# Altium PCB heart.PcbDoc (part 6 of 8)
Units mil, origin at the board's own origin, x right, y up, seen from the top; angles counter-clockwise.
Board outline 5000 x 6000 mil, 2 copper layers (Top Layer, Bottom Layer); 76 components, 43 nets, 328 pads, 50 vias.
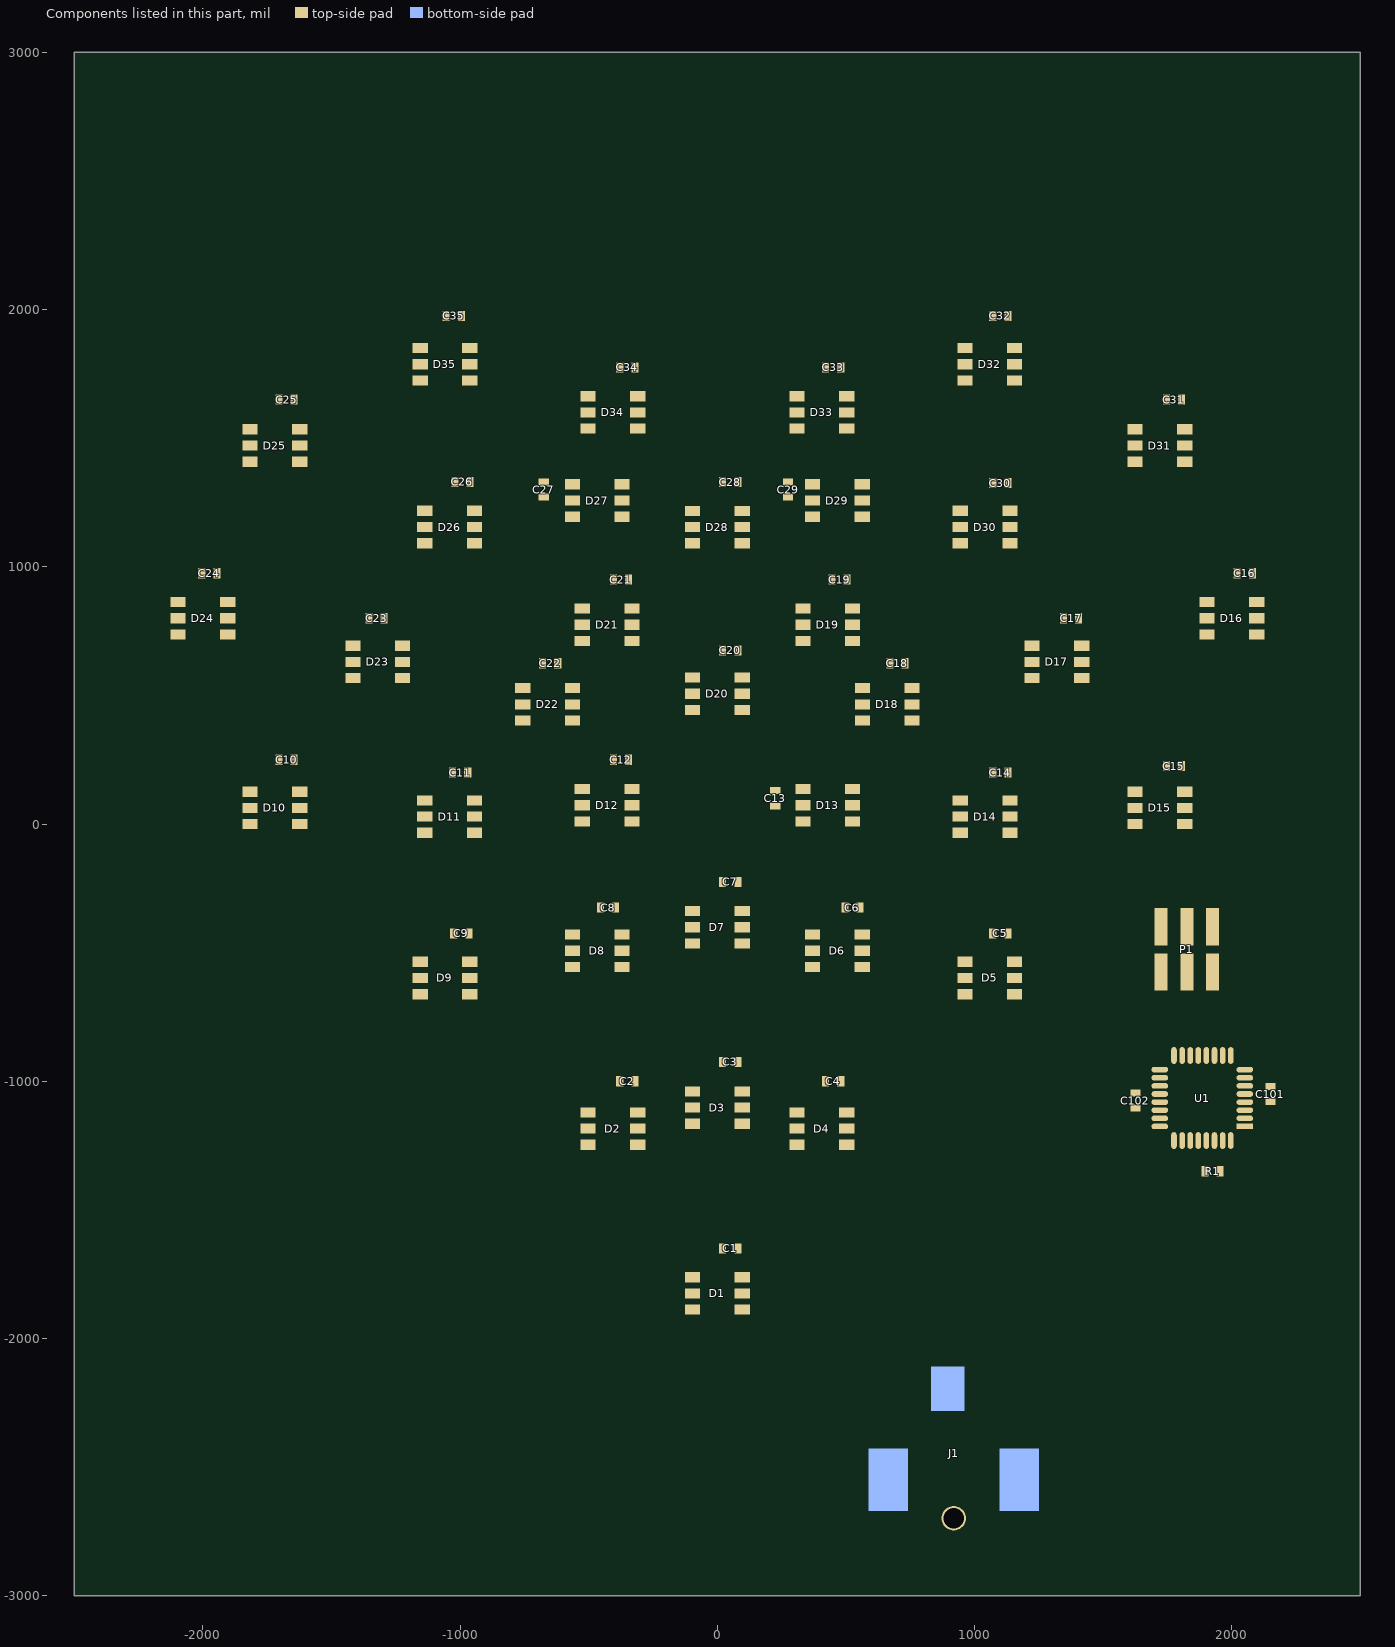
[diagram p6: the components of this part, seen from the top]

## Via types
v1: diameter 48, hole 20, Top Layer to Bottom Layer, 46 vias
v2: diameter 165, hole 150, Top Layer to Bottom Layer, 4 vias

## Nets (pads, with @x,y where several pads share a name; then routed paths per layer and width w, separated by ;. In a path a pad name is that pad's centre, name@x,y a point inside that pad or via, vN(x,y) a via of type N, cw(c..) or ccw(c..) an arc to the next point about the centre after c; other vN are vias at no path point) (continued)
copper on no net: (continued)
  Bottom Layer w2.65: -1205.16,-1289.4 -1194.54,-1289.4 ; -1205.16,-1286.75 -1194.54,-1286.75 ; -1205.16,-1284.09 -1197.19,-1284.09 ; -1205.16,-1281.44 -1197.19,-1281.44 ; -1205.16,-1278.78 -1199.85,-1278.78 ; -1202.5,-1992.98 -1128.16,-1992.98 ; -1202.5,-1841.65 -1157.37,-1841.65 ; -1202.5,-1459.32 -1077.71,-1459.32 ; -1202.5,-1307.99 -1165.33,-1307.99 ; -1202.5,-1305.33 -1112.23,-1305.33 ; -1202.5,-1302.68 -1117.54,-1302.68 ; -1202.5,-1300.02 -1122.85,-1300.02 ; -1202.5,-1276.13 -1199.85,-1276.13 ; -1199.85,-2247.87 -1157.37,-2247.87 ; -1199.85,-1923.95 -1090.99,-1923.95 ; -1199.85,-1844.3 -1154.71,-1844.3 ; -1199.85,-1270.82 -1197.19,-1270.82 ; -1197.19,-2141.66 -1125.51,-2141.66 ; -1197.19,-1990.33 -1136.13,-1990.33 ; -1197.19,-1846.96 -1152.06,-1846.96 ; -1194.54,-2250.52 -1165.33,-2250.52 ; -1194.54,-1849.61 -1149.4,-1849.61 ; -1191.88,-1921.3 -1088.34,-1921.3 ; -1191.88,-1873.51 -1186.57,-1873.51 ; -1191.88,-1870.85 -1189.23,-1870.85 ; -1191.88,-1852.27 -1146.75,-1852.27 ; -1189.23,-1987.67 -1144.09,-1987.67 ; -1189.23,-1878.82 -1181.26,-1878.82 ; -1189.23,-1876.16 -1183.92,-1876.16 ; -1189.23,-1854.92 -1146.75,-1854.92 ; -1189.23,-1549.59 -1016.65,-1549.59 ; -1189.23,-1546.94 -1024.61,-1546.94 ; -1189.23,-1544.28 -1032.58,-1544.28 ; -1189.23,-1541.63 -1043.2,-1541.63 ; -1189.23,-1538.97 -1051.16,-1538.97 ; -1189.23,-1536.32 -1061.78,-1536.32 ; -1189.23,-1281.44 -1162.68,-1281.44 ; -1189.23,-1278.78 -1157.37,-1278.78 ; -1189.23,-1276.13 -1149.4,-1276.13 ; -1189.23,-1273.47 -1144.09,-1273.47 ; -1186.57,-2157.6 -1173.3,-2157.6 ; -1186.57,-2154.94 -1173.3,-2154.94 ; -1186.57,-2139.01 -1154.71,-2139.01 ; -1186.57,-1918.64 -1083.03,-1918.64 ; -1186.57,-1886.78 -1173.3,-1886.78 ; -1186.57,-1884.13 -1175.95,-1884.13 ; -1186.57,-1881.47 -1178.61,-1881.47 ; -1186.57,-1857.58 -1144.09,-1857.58 ; -1186.57,-1552.25 -1006.03,-1552.25 ; -1186.57,-1533.66 -1072.4,-1533.66 ; -1186.57,-1395.6 -1170.64,-1395.6 ; -1186.57,-1392.95 -1173.3,-1392.95 ; -1186.57,-1390.29 -1173.3,-1390.29 ; -1186.57,-1387.64 -1175.95,-1387.64 ; -1186.57,-1384.98 -1175.95,-1384.98 ; -1186.57,-1382.33 -1175.95,-1382.33 ; -1186.57,-1379.67 -1175.95,-1379.67 ; -1186.57,-1377.02 -1173.3,-1377.02 ; -1186.57,-1270.82 -1136.13,-1270.82 ; -1183.92,-2162.91 -1170.64,-2162.91 ; -1183.92,-2160.25 -1170.64,-2160.25 ; -1183.92,-1985.02 -1154.71,-1985.02 ; -1183.92,-1915.99 -1128.16,-1915.99 ; -1183.92,-1913.33 -1133.47,-1913.33 ; -1183.92,-1910.68 -1138.78,-1910.68 ; -1183.92,-1897.4 -1160.02,-1897.4 ; -1183.92,-1894.75 -1162.68,-1894.75 ; -1183.92,-1892.09 -1165.33,-1892.09 ; -1183.92,-1889.44 -1170.64,-1889.44 ; -1183.92,-1860.23 -1141.44,-1860.23 ; -1183.92,-1759.34 -1056.47,-1759.34 ; -1183.92,-1557.56 -990.1,-1557.56 ; -1183.92,-1554.9 -998.06,-1554.9 ; -1183.92,-1531.01 -1085.68,-1531.01 ; -1183.92,-1400.91 -1167.99,-1400.91 ; -1183.92,-1398.26 -1170.64,-1398.26 ; -1183.92,-1374.36 -1173.3,-1374.36 ; -1183.92,-1371.71 -1170.64,-1371.71 ; -1183.92,-1284.09 -1170.64,-1284.09 ; -1181.26,-2181.49 -1178.61,-2181.49 ; -1181.26,-2168.22 -1173.3,-2168.22 ; -1181.26,-2165.56 -1170.64,-2165.56 ; -1181.26,-1908.02 -1144.09,-1908.02 ; -1181.26,-1905.37 -1149.4,-1905.37 ; -1181.26,-1902.71 -1152.06,-1902.71 ; -1181.26,-1900.06 -1157.37,-1900.06 ; -1181.26,-1862.89 -1138.78,-1862.89 ; -1181.26,-1560.21 -982.13,-1560.21 ; -1181.26,-1528.35 -1098.96,-1528.35 ; -1181.26,-1403.57 -1162.68,-1403.57 ; -1181.26,-1369.05 -1170.64,-1369.05 ; -1181.26,-1366.4 -1165.33,-1366.4 ; -1181.26,-1268.16 -1128.16,-1268.16 ; -1178.61,-2178.84 -1175.95,-2178.84 ; -1178.61,-2176.18 -1175.95,-2176.18 ; -1178.61,-2173.53 -1173.3,-2173.53 ; -1178.61,-2170.87 -1173.3,-2170.87 ; -1178.61,-1865.54 -1138.78,-1865.54 ; -1178.61,-1762 -1056.47,-1762 ; -1178.61,-1562.87 -976.82,-1562.87 ; -1178.61,-1406.22 -1157.37,-1406.22 ; -1178.61,-1363.74 -1162.68,-1363.74 ; -1178.61,-1297.37 -1125.51,-1297.37 ; -1178.61,-1260.2 -1106.92,-1260.2 ; -1178.61,-1257.54 -1101.61,-1257.54 ; -1175.95,-2279.73 -804.25,-2279.73 ; -1175.95,-1868.2 -1136.13,-1868.2 ; -1175.95,-1764.65 -1056.47,-1764.65 ; -1175.95,-1565.52 -968.86,-1565.52 ; -1175.95,-1408.88 -1106.92,-1408.88 ; -1175.95,-1265.51 -1122.85,-1265.51 ; -1175.95,-1262.85 -1114.89,-1262.85 ; -1173.3,-2080.6 -1157.37,-2080.6 ; -1173.3,-2077.94 -1160.02,-2077.94 ; -1173.3,-2075.29 -1162.68,-2075.29 ; -1173.3,-2072.63 -1162.68,-2072.63 ; -1173.3,-1870.85 -1133.47,-1870.85 ; -1173.3,-1767.31 -1056.47,-1767.31 ; -1173.3,-1568.18 -960.89,-1568.18 ; -1173.3,-1525.7 -1117.54,-1525.7 ; -1173.3,-1411.53 -1109.58,-1411.53 ; -1173.3,-1361.09 -1141.44,-1361.09 ; -1170.64,-2261.14 -1154.71,-2261.14 ; -1170.64,-2085.91 -1083.03,-2085.91 ; -1170.64,-2083.25 -1152.06,-2083.25 ; -1170.64,-2069.98 -1165.33,-2069.98 ; -1170.64,-2067.32 -1165.33,-2067.32 ; -1170.64,-1873.51 -1133.47,-1873.51 ; -1170.64,-1769.96 -1056.47,-1769.96 ; -1170.64,-1414.19 -1114.89,-1414.19 ; -1170.64,-1358.43 -1146.75,-1358.43 ; -1167.99,-2064.67 -1165.33,-2064.67 ; -1167.99,-1876.16 -1130.82,-1876.16 ; -1167.99,-1570.83 -952.93,-1570.83 ; -1167.99,-1294.71 -1130.82,-1294.71 ; -1165.33,-2277.07 -974.17,-2277.07 ; -1165.33,-2088.56 -1083.03,-2088.56 ; -1165.33,-1878.82 -1130.82,-1878.82 ; -1165.33,-1772.62 -1056.47,-1772.62 ; -1165.33,-1573.49 -947.62,-1573.49 ; -1165.33,-1416.84 -1120.2,-1416.84 ; -1165.33,-1390.29 -1120.2,-1390.29 ; -1165.33,-1387.64 -1117.54,-1387.64 ; -1162.68,-1881.47 -1128.16,-1881.47 ; -1162.68,-1775.27 -1056.47,-1775.27 ; -1162.68,-1576.14 -1122.85,-1576.14 ; -1162.68,-1392.95 -1122.85,-1392.95 ; -1162.68,-1355.78 -1154.71,-1355.78 ; -1162.68,-1292.06 -1130.82,-1292.06 ; -1160.02,-2274.42 -976.82,-2274.42 ; -1160.02,-2258.49 -1152.06,-2258.49 ; -1160.02,-2091.22 -1085.68,-2091.22 ; -1160.02,-1884.13 -1128.16,-1884.13 ; -1160.02,-1777.93 -1053.82,-1777.93 ; -1160.02,-1419.5 -1128.16,-1419.5 ; -1160.02,-1395.6 -1128.16,-1395.6 ; -1157.37,-2152.28 -1120.2,-2152.28 ; -1157.37,-1886.78 -1128.16,-1886.78 ; -1157.37,-1780.58 -1053.82,-1780.58 ; -1157.37,-1578.8 -1120.2,-1578.8 ; -1157.37,-1289.4 -1122.85,-1289.4 ; -1154.71,-2271.76 -979.48,-2271.76 ; -1154.71,-1783.24 -1051.16,-1783.24 ; -1154.71,-1581.45 -1114.89,-1581.45 ; -1152.06,-1966.43 -1106.92,-1966.43 ; -1152.06,-1889.44 -1125.51,-1889.44 ; -1152.06,-1804.48 -1146.75,-1804.48 ; -1152.06,-1801.82 -1149.4,-1801.82 ; -1152.06,-1785.89 -1051.16,-1785.89 ; -1152.06,-1398.26 -1136.13,-1398.26 ; -1152.06,-1286.75 -1114.89,-1286.75 ; -1149.4,-2269.11 -979.48,-2269.11 ; -1149.4,-1892.09 -1125.51,-1892.09 ; -1149.4,-1807.13 -1144.09,-1807.13 ; -1149.4,-1788.55 -1051.16,-1788.55 ; -1149.4,-1584.11 -1112.23,-1584.11 ; -1146.75,-2266.45 -971.51,-2266.45 ; -1146.75,-2154.94 -1114.89,-2154.94 ; -1146.75,-2051.39 -867.97,-2051.39 ; -1146.75,-1894.75 -1125.51,-1894.75 ; -1146.75,-1809.79 -1141.44,-1809.79 ; -1146.75,-1791.2 -1048.51,-1791.2 ; -1146.75,-1586.76 -1106.92,-1586.76 ; -1146.75,-1284.09 -1106.92,-1284.09 ; -1144.09,-2263.8 -966.2,-2263.8 ; -1144.09,-2083.25 -1080.37,-2083.25 ; -1144.09,-1969.09 -1104.27,-1969.09 ; -1144.09,-1812.44 -1138.78,-1812.44 ; -1141.44,-2261.14 -960.89,-2261.14 ; -1141.44,-2139.01 -1125.51,-2139.01 ; -1141.44,-2093.87 -1085.68,-2093.87 ; -1141.44,-1897.4 -1125.51,-1897.4 ; -1141.44,-1815.1 -1133.47,-1815.1 ; -1141.44,-1793.86 -1048.51,-1793.86 ; -1141.44,-1589.42 -1101.61,-1589.42 ; -1138.78,-2258.49 -960.89,-2258.49 ; -1138.78,-2255.83 -963.55,-2255.83 ; -1138.78,-2157.6 -1109.58,-2157.6 ; -1138.78,-2080.6 -1077.71,-2080.6 ; -1138.78,-2054.05 -867.97,-2054.05 ; -1138.78,-1817.75 -1130.82,-1817.75 ; -1138.78,-1796.51 -1045.85,-1796.51 ; -1138.78,-1592.07 -1096.3,-1592.07 ; -1138.78,-1307.99 -1109.58,-1307.99 ; -1138.78,-1281.44 -1101.61,-1281.44 ; -1136.13,-2253.18 -966.2,-2253.18 ; -1136.13,-2250.52 -966.2,-2250.52 ; -1136.13,-2247.87 -968.86,-2247.87 ; -1136.13,-2245.21 -971.51,-2245.21 ; -1136.13,-2136.35 -1125.51,-2136.35 ; -1136.13,-2077.94 -1077.71,-2077.94 ; -1136.13,-2056.7 -870.62,-2056.7 ; -1136.13,-1971.74 -1104.27,-1971.74 ; -1136.13,-1900.06 -1128.16,-1900.06 ; -1136.13,-1823.06 -1125.51,-1823.06 ; -1136.13,-1820.41 -1128.16,-1820.41 ; -1136.13,-1799.17 -1043.2,-1799.17 ; -1133.47,-2160.25 -1104.27,-2160.25 ; -1133.47,-2133.7 -1122.85,-2133.7 ; -1133.47,-2075.29 -1075.06,-2075.29 ; -1133.47,-2072.63 -1072.4,-2072.63 ; -1133.47,-2062.01 -1053.82,-2062.01 ; -1133.47,-2059.36 -1043.2,-2059.36 ; -1133.47,-1825.72 -1122.85,-1825.72 ; -1133.47,-1801.82 -1043.2,-1801.82 ; -1133.47,-1594.73 -1090.99,-1594.73 ; -1133.47,-1430.12 -1064.44,-1430.12 ; -1130.82,-2131.04 -1122.85,-2131.04 ; -1130.82,-2069.98 -1069.75,-2069.98 ; -1130.82,-2067.32 -1064.44,-2067.32 ; -1130.82,-2064.67 -1061.78,-2064.67 ; -1130.82,-1828.37 -1117.54,-1828.37 ; -1130.82,-1804.48 -1040.54,-1804.48 ; -1130.82,-1496.49 -1059.13,-1496.49 ; -1130.82,-1406.22 -1104.27,-1406.22 ; -1130.82,-1310.64 -1106.92,-1310.64 ; -1130.82,-1278.78 -1093.65,-1278.78 ; -1128.16,-2162.91 -1098.96,-2162.91 ; -1128.16,-2128.39 -1125.51,-2128.39 ; -1128.16,-2125.73 -1125.51,-2125.73 ; -1128.16,-2123.08 -1125.51,-2123.08 ; -1128.16,-1974.4 -1101.61,-1974.4 ; -1128.16,-1831.03 -1114.89,-1831.03 ; -1128.16,-1597.38 -1088.34,-1597.38 ; -1125.51,-1833.68 -1112.23,-1833.68 ; -1125.51,-1807.13 -1037.89,-1807.13 ; -1125.51,-1313.3 -1101.61,-1313.3 ; -1125.51,-1276.13 -1085.68,-1276.13 ; -1122.85,-2165.56 -1096.3,-2165.56 ; -1122.85,-1977.05 -1098.96,-1977.05 ; -1122.85,-1836.34 -1109.58,-1836.34 ; -1122.85,-1809.79 -1035.23,-1809.79 ; -1122.85,-1600.04 -1083.03,-1600.04 ; -1122.85,-1427.46 -1059.13,-1427.46 ; -1122.85,-1403.57 -1101.61,-1403.57 ; -1120.2,-2096.53 -1085.68,-2096.53 ; -1120.2,-1841.65 -1101.61,-1841.65 ; -1120.2,-1838.99 -1106.92,-1838.99 ; -1120.2,-1812.44 -1035.23,-1812.44 ; -1120.2,-1400.91 -1098.96,-1400.91 ; -1120.2,-1315.95 -1101.61,-1315.95 ; -1117.54,-2168.22 -1090.99,-2168.22 ; -1117.54,-1844.3 -1098.96,-1844.3 ; -1117.54,-1815.1 -1032.58,-1815.1 ; -1117.54,-1602.69 -1077.71,-1602.69 ; -1117.54,-1424.81 -1056.47,-1424.81 ; -1117.54,-1318.61 -1098.96,-1318.61 ; -1117.54,-1273.47 -1077.71,-1273.47 ; -1114.89,-1979.71 -1098.96,-1979.71 ; -1114.89,-1849.61 -1093.65,-1849.61 ; -1114.89,-1846.96 -1096.3,-1846.96 ; -1114.89,-1817.75 -1029.92,-1817.75 ; -1114.89,-1398.26 -1096.3,-1398.26 ; -1112.23,-2170.87 -1085.68,-2170.87 ; -1112.23,-2099.18 -1085.68,-2099.18 ; -1112.23,-1852.27 -1090.99,-1852.27 ; -1112.23,-1820.41 -1027.27,-1820.41 ; -1112.23,-1605.35 -1075.06,-1605.35 ; -1112.23,-1422.15 -1048.51,-1422.15 ; -1112.23,-1395.6 -1069.75,-1395.6 ; -1112.23,-1321.26 -1096.3,-1321.26 ; -1109.58,-2173.53 -1080.37,-2173.53 ; -1109.58,-2101.84 -1085.68,-2101.84 ; -1109.58,-1857.58 -1083.03,-1857.58 ; -1109.58,-1854.92 -1085.68,-1854.92 ; -1109.58,-1392.95 -1064.44,-1392.95 ; -1109.58,-1326.57 -1093.65,-1326.57 ; -1109.58,-1323.92 -1093.65,-1323.92 ; -1109.58,-1270.82 -1069.75,-1270.82 ; -1106.92,-1982.36 -1093.65,-1982.36 ; -1106.92,-1915.99 -1075.06,-1915.99 ; -1106.92,-1862.89 -1077.71,-1862.89 ; -1106.92,-1860.23 -1080.37,-1860.23 ; -1106.92,-1823.06 -1024.61,-1823.06 ; -1106.92,-1608 -1069.75,-1608 ; -1106.92,-1499.15 -1051.16,-1499.15 ; -1106.92,-1419.5 -1040.54,-1419.5 ; -1106.92,-1390.29 -1061.78,-1390.29 ; -1106.92,-1329.23 -1090.99,-1329.23 ; -1104.27,-2176.18 -1072.4,-2176.18 ; -1104.27,-2104.49 -1085.68,-2104.49 ; -1104.27,-1870.85 -1067.09,-1870.85 ; -1104.27,-1868.2 -1069.75,-1868.2 ; -1104.27,-1865.54 -1072.4,-1865.54 ; -1104.27,-1825.72 -1021.96,-1825.72 ; -1104.27,-1576.14 -939.65,-1576.14 ; -1104.27,-1387.64 -1061.78,-1387.64 ; -1104.27,-1384.98 -1077.71,-1384.98 ; -1104.27,-1334.54 -1088.34,-1334.54 ; -1104.27,-1331.88 -1090.99,-1331.88 ; -1104.27,-1268.16 -1061.78,-1268.16 ; -1101.61,-2107.15 -1085.68,-2107.15 ; -1101.61,-1985.02 -1090.99,-1985.02 ; -1101.61,-1913.33 -1000.72,-1913.33 ; -1101.61,-1910.68 -1006.03,-1910.68 ; -1101.61,-1876.16 -1059.13,-1876.16 ; -1101.61,-1873.51 -1064.44,-1873.51 ; -1101.61,-1828.37 -1019.3,-1828.37 ; -1101.61,-1610.66 -1067.09,-1610.66 ; -1101.61,-1416.84 -1027.27,-1416.84 ; -1101.61,-1382.33 -1083.03,-1382.33 ; -1101.61,-1379.67 -1085.68,-1379.67 ; -1101.61,-1339.85 -1085.68,-1339.85 ; -1101.61,-1337.19 -1088.34,-1337.19 ; -1098.96,-2178.84 -1067.09,-2178.84 ; -1098.96,-2109.8 -1085.68,-2109.8 ; -1098.96,-1908.02 -1011.34,-1908.02 ; -1098.96,-1905.37 -1016.65,-1905.37 ; -1098.96,-1902.71 -1019.3,-1902.71 ; -1098.96,-1900.06 -1024.61,-1900.06 ; -1098.96,-1889.44 -1040.54,-1889.44 ; -1098.96,-1886.78 -1045.85,-1886.78 ; -1098.96,-1884.13 -1048.51,-1884.13 ; -1098.96,-1881.47 -1051.16,-1881.47 ; -1098.96,-1878.82 -1056.47,-1878.82 ; -1098.96,-1831.03 -1016.65,-1831.03 ; -1098.96,-1578.8 -934.34,-1578.8 ; -1098.96,-1414.19 -1003.37,-1414.19 ; -1098.96,-1377.02 -1085.68,-1377.02 ; -1098.96,-1374.36 -1085.68,-1374.36 ; -1098.96,-1371.71 -1085.68,-1371.71 ; -1098.96,-1347.81 -1085.68,-1347.81 ; -1098.96,-1345.16 -1085.68,-1345.16 ; -1098.96,-1342.5 -1085.68,-1342.5 ; -1096.3,-2205.39 -1085.68,-2205.39 ; -1096.3,-2202.73 -1085.68,-2202.73 ; -1096.3,-2200.08 -1083.03,-2200.08 ; -1096.3,-2197.42 -1080.37,-2197.42 ; -1096.3,-2115.11 -1085.68,-2115.11 ; -1096.3,-2112.46 -1085.68,-2112.46 ; -1096.3,-1897.4 -1029.92,-1897.4 ; -1096.3,-1894.75 -1032.58,-1894.75 ; -1096.3,-1892.09 -1037.89,-1892.09 ; -1096.3,-1613.31 -1064.44,-1613.31 ; -1096.3,-1411.53 -990.1,-1411.53 ; -1096.3,-1369.05 -1083.03,-1369.05 ; -1096.3,-1366.4 -1083.03,-1366.4 ; -1096.3,-1363.74 -1083.03,-1363.74 ; -1096.3,-1361.09 -1083.03,-1361.09 ; -1096.3,-1358.43 -1083.03,-1358.43 ; -1096.3,-1355.78 -1083.03,-1355.78 ; -1096.3,-1353.12 -1083.03,-1353.12 ; -1096.3,-1350.47 -1083.03,-1350.47 ; -1096.3,-1265.51 -1053.82,-1265.51 ; -1093.65,-2213.35 -1088.34,-2213.35 ; -1093.65,-2210.7 -1088.34,-2210.7 ; -1093.65,-2208.04 -1088.34,-2208.04 ; -1093.65,-2194.77 -1077.71,-2194.77 ; -1093.65,-2192.11 -1077.71,-2192.11 ; -1093.65,-2189.46 -1011.34,-2189.46 ; -1093.65,-2186.8 -1006.03,-2186.8 ; -1093.65,-2181.49 -1056.47,-2181.49 ; -1093.65,-2120.42 -1083.03,-2120.42 ; -1093.65,-2117.77 -1083.03,-2117.77 ; -1093.65,-1833.68 -1013.99,-1833.68 ; -1093.65,-1581.45 -926.38,-1581.45 ; -1093.65,-1408.88 -984.79,-1408.88 ; -1090.99,-2216.01 -1088.34,-2216.01 ; -1090.99,-2184.15 -1003.37,-2184.15 ; -1090.99,-2125.73 -1080.37,-2125.73 ; -1090.99,-2123.08 -1080.37,-2123.08 ; -1090.99,-1836.34 -1011.34,-1836.34 ; -1090.99,-1615.97 -1061.78,-1615.97 ; -1090.99,-1501.8 -1043.2,-1501.8 ; -1088.34,-1838.99 -1008.68,-1838.99 ; -1088.34,-1584.11 -921.07,-1584.11 ; -1088.34,-1262.85 -1043.2,-1262.85 ; -1085.68,-1841.65 -1006.03,-1841.65 ; -1085.68,-1398.26 -1077.71,-1398.26 ; -1083.03,-1844.3 -1003.37,-1844.3 ; -1083.03,-1618.62 -1059.13,-1618.62 ; -1083.03,-1586.76 -915.76,-1586.76 ; -1083.03,-1260.2 -1032.58,-1260.2 ; -1080.37,-1257.54 -979.48,-1257.54 ; -1077.71,-2109.8 -1064.44,-2109.8 ; -1077.71,-2107.15 -1064.44,-2107.15 ; -1077.71,-2104.49 -1064.44,-2104.49 ; -1077.71,-2101.84 -1064.44,-2101.84 ; -1077.71,-2099.18 -1064.44,-2099.18 ; -1077.71,-2096.53 -1064.44,-2096.53 ; -1077.71,-1846.96 -1000.72,-1846.96 ; -1077.71,-1589.42 -910.45,-1589.42 ; -1077.71,-1284.09 -984.79,-1284.09 ; -1077.71,-1254.89 -1067.09,-1254.89 ; -1075.06,-2117.77 -1061.78,-2117.77 ; -1075.06,-2115.11 -1061.78,-2115.11 ; -1075.06,-2112.46 -1064.44,-2112.46 ; -1075.06,-2093.87 -1061.78,-2093.87 ; -1075.06,-2091.22 -1059.13,-2091.22 ; -1075.06,-1849.61 -995.41,-1849.61 ; -1075.06,-1592.07 -902.48,-1592.07 ; -1075.06,-1504.46 -804.25,-1504.46 ; -1075.06,-1252.23 -1067.09,-1252.23 ; -1072.4,-2120.42 -1059.13,-2120.42 ; -1072.4,-2088.56 -1056.47,-2088.56 ; -1072.4,-2085.91 -1053.82,-2085.91 ; -1072.4,-2003.6 -918.41,-2003.6 ; -1072.4,-1852.27 -992.75,-1852.27 ; -1072.4,-1621.28 -1061.78,-1621.28 ; -1072.4,-1281.44 -984.79,-1281.44 ; -1072.4,-1249.58 -1067.09,-1249.58 ; -1072.4,-1246.92 -1064.44,-1246.92 ; -1072.4,-1212.41 -929.03,-1212.41 ; -1069.75,-2231.94 -990.1,-2231.94 ; -1069.75,-2123.08 -1056.47,-2123.08 ; -1069.75,-2083.25 -1048.51,-2083.25 ; -1069.75,-1594.73 -897.17,-1594.73 ; -1069.75,-1406.22 -982.13,-1406.22 ; -1069.75,-1244.27 -1064.44,-1244.27 ; -1067.09,-2192.11 -1016.65,-2192.11 ; -1067.09,-2125.73 -1051.16,-2125.73 ; -1067.09,-2080.6 -998.06,-2080.6 ; -1067.09,-1854.92 -990.1,-1854.92 ; -1067.09,-1597.38 -891.86,-1597.38 ; -1067.09,-1384.98 -1059.13,-1384.98 ; -1067.09,-1241.61 -1064.44,-1241.61 ; -1067.09,-1238.96 -1064.44,-1238.96 ; -1064.44,-2128.39 -1032.58,-2128.39 ; -1064.44,-2077.94 -1000.72,-2077.94 ; -1064.44,-1857.58 -987.44,-1857.58 ; -1064.44,-1650.49 -825.49,-1650.49 ; -1064.44,-1507.11 -804.25,-1507.11 ; -1064.44,-1472.6 -1061.78,-1472.6 ; -1064.44,-1469.94 -1059.13,-1469.94 ; -1064.44,-1467.29 -1059.13,-1467.29 ; -1064.44,-1464.63 -1056.47,-1464.63 ; -1064.44,-1461.98 -1056.47,-1461.98 ; -1064.44,-1459.32 -1053.82,-1459.32 ; -1064.44,-1456.67 -1048.51,-1456.67 ; -1064.44,-1454.01 -1040.54,-1454.01 ; -1064.44,-1403.57 -976.82,-1403.57 ; -1064.44,-1382.33 -1059.13,-1382.33 ; -1064.44,-1278.78 -987.44,-1278.78 ; -1064.44,-1254.89 -982.13,-1254.89 ; -1064.44,-1215.06 -923.72,-1215.06 ; -1061.78,-2075.29 -1006.03,-2075.29 ; -1061.78,-1860.23 -982.13,-1860.23 ; -1061.78,-1600.04 -886.55,-1600.04 ; -1061.78,-1451.36 -947.62,-1451.36 ; -1061.78,-1379.67 -1059.13,-1379.67 ; -1061.78,-1217.72 -907.79,-1217.72 ; -1059.13,-2194.77 -1021.96,-2194.77 ; -1059.13,-2131.04 -1035.23,-2131.04 ; -1059.13,-2000.95 -918.41,-2000.95 ; -1059.13,-1915.99 -995.41,-1915.99 ; -1059.13,-1862.89 -979.48,-1862.89 ; -1059.13,-1602.69 -881.24,-1602.69 ; -1059.13,-1448.7 -947.62,-1448.7 ; -1059.13,-1446.05 -947.62,-1446.05 ; -1059.13,-1400.91 -974.17,-1400.91 ; -1056.47,-2109.8 -1000.72,-2109.8 ; -1056.47,-2107.15 -1003.37,-2107.15 ; -1056.47,-2104.49 -1006.03,-2104.49 ; -1056.47,-2101.84 -1006.03,-2101.84 ; -1056.47,-2072.63 -1011.34,-2072.63 ; -1056.47,-1605.35 -878.59,-1605.35 ; -1056.47,-1398.26 -971.51,-1398.26 ; -1056.47,-1395.6 -971.51,-1395.6 ; -1056.47,-1276.13 -990.1,-1276.13 ; -1056.47,-1252.23 -987.44,-1252.23 ; -1056.47,-1225.68 -905.14,-1225.68 ; -1056.47,-1223.03 -905.14,-1223.03 ; -1056.47,-1220.37 -907.79,-1220.37 ; -1053.82,-2197.42 -1019.3,-2197.42 ; -1053.82,-2133.7 -1045.85,-2133.7 ; -1053.82,-2112.46 -1000.72,-2112.46 ; -1053.82,-2099.18 -1011.34,-2099.18 ; -1053.82,-1998.29 -921.07,-1998.29 ; -1053.82,-1865.54 -974.17,-1865.54 ; -1053.82,-1608 -873.28,-1608 ; -1053.82,-1443.39 -944.96,-1443.39 ; -1053.82,-1392.95 -968.86,-1392.95 ; -1053.82,-1241.61 -1051.16,-1241.61 ; -1053.82,-1238.96 -1040.54,-1238.96 ; -1053.82,-1236.3 -907.79,-1236.3 ; -1053.82,-1233.65 -907.79,-1233.65 ; -1053.82,-1230.99 -907.79,-1230.99 ; -1053.82,-1228.34 -905.14,-1228.34 ; -1051.16,-2115.11 -1027.27,-2115.11 ; -1051.16,-2096.53 -1013.99,-2096.53 ; -1051.16,-1918.64 -990.1,-1918.64 ; -1051.16,-1868.2 -971.51,-1868.2 ; -1051.16,-1610.66 -867.97,-1610.66 ; -1051.16,-1509.77 -806.9,-1509.77 ; -1051.16,-1440.74 -944.96,-1440.74 ; -1051.16,-1390.29 -968.86,-1390.29 ; -1051.16,-1387.64 -966.2,-1387.64 ; -1048.51,-2200.08 -1013.99,-2200.08 ; -1048.51,-2093.87 -1019.3,-2093.87 ; -1048.51,-2069.98 -1019.3,-2069.98 ; -1048.51,-1995.64 -921.07,-1995.64 ; -1048.51,-1870.85 -968.86,-1870.85 ; -1048.51,-1647.83 -828.14,-1647.83 ; -1048.51,-1613.31 -862.66,-1613.31 ; -1048.51,-1273.47 -995.41,-1273.47 ; -1045.85,-2117.77 -1035.23,-2117.77 ; -1045.85,-1992.98 -921.07,-1992.98 ; -1045.85,-1921.3 -982.13,-1921.3 ; -1045.85,-1645.18 -828.14,-1645.18 ; -1045.85,-1615.97 -860,-1615.97 ; -1045.85,-1249.58 -995.41,-1249.58 ; -1043.2,-2091.22 -1027.27,-2091.22 ; -1043.2,-1990.33 -923.72,-1990.33 ; -1043.2,-1923.95 -878.59,-1923.95 ; -1043.2,-1873.51 -963.55,-1873.51 ; -1043.2,-1642.52 -830.8,-1642.52 ; -1043.2,-1618.62 -854.69,-1618.62 ; -1043.2,-1438.08 -942.31,-1438.08 ; -1043.2,-1315.95 -1035.23,-1315.95 ; -1043.2,-1313.3 -1037.89,-1313.3 ; -1043.2,-1310.64 -1040.54,-1310.64 ; -1040.54,-2202.73 -1006.03,-2202.73 ; -1040.54,-1987.67 -923.72,-1987.67 ; -1040.54,-1926.61 -886.55,-1926.61 ; -1040.54,-1876.16 -958.24,-1876.16 ; -1040.54,-1759.34 -764.42,-1759.34 ; -1040.54,-1639.86 -833.45,-1639.86 ; -1040.54,-1637.21 -833.45,-1637.21 ; -1040.54,-1626.59 -844.07,-1626.59 ; -1040.54,-1623.93 -849.38,-1623.93 ; -1040.54,-1621.28 -852.04,-1621.28 ; -1040.54,-1512.42 -809.56,-1512.42 ; -1040.54,-1321.26 -1027.27,-1321.26 ; -1040.54,-1318.61 -1032.58,-1318.61 ; -1037.89,-1985.02 -923.72,-1985.02 ; -1037.89,-1929.26 -889.21,-1929.26 ; -1037.89,-1878.82 -955.58,-1878.82 ; -1037.89,-1767.31 -753.8,-1767.31 ; -1037.89,-1764.65 -756.46,-1764.65 ; -1037.89,-1762 -759.11,-1762 ; -1037.89,-1756.69 -764.42,-1756.69 ; -1037.89,-1754.03 -767.08,-1754.03 ; -1037.89,-1634.55 -836.11,-1634.55 ; -1037.89,-1631.9 -838.76,-1631.9 ; -1037.89,-1629.24 -841.42,-1629.24 ; -1037.89,-1323.92 -1024.61,-1323.92 ; -1037.89,-1270.82 -1000.72,-1270.82 ; -1035.23,-2205.39 -998.06,-2205.39 ; -1035.23,-1982.36 -923.72,-1982.36 ; -1035.23,-1931.92 -894.52,-1931.92 ; -1035.23,-1772.62 -743.18,-1772.62 ; -1035.23,-1769.96 -748.49,-1769.96 ; -1035.23,-1751.38 -769.73,-1751.38 ; -1035.23,-1329.23 -974.17,-1329.23 ; -1035.23,-1326.57 -1016.65,-1326.57 ; -1032.58,-1979.71 -923.72,-1979.71 ; -1032.58,-1977.05 -921.07,-1977.05 ; -1032.58,-1937.23 -899.83,-1937.23 ; -1032.58,-1934.57 -897.17,-1934.57 ; -1032.58,-1881.47 -950.27,-1881.47 ; -1032.58,-1777.93 -562.64,-1777.93 ; -1032.58,-1775.27 -735.22,-1775.27 ; -1032.58,-1748.72 -772.39,-1748.72 ; -1032.58,-1454.01 -950.27,-1454.01 ; -1032.58,-1331.88 -976.82,-1331.88 ; -1032.58,-1246.92 -1006.03,-1246.92 ; -1029.92,-2208.04 -990.1,-2208.04 ; -1029.92,-2181.49 -998.06,-2181.49 ; -1029.92,-1974.4 -921.07,-1974.4 ; -1029.92,-1971.74 -921.07,-1971.74 ; -1029.92,-1969.09 -918.41,-1969.09 ; -1029.92,-1945.19 -907.79,-1945.19 ; -1029.92,-1942.54 -905.14,-1942.54 ; -1029.92,-1939.88 -902.48,-1939.88 ; -1029.92,-1884.13 -944.96,-1884.13 ; -1029.92,-1780.58 -562.64,-1780.58 ; -1029.92,-1746.07 -772.39,-1746.07 ; -1029.92,-1515.08 -812.21,-1515.08 ; -1029.92,-1501.8 -830.8,-1501.8 ; -1029.92,-1435.43 -942.31,-1435.43 ; -1027.27,-1966.43 -918.41,-1966.43 ; -1027.27,-1963.78 -918.41,-1963.78 ; -1027.27,-1961.12 -918.41,-1961.12 ; -1027.27,-1958.47 -915.76,-1958.47 ; -1027.27,-1955.81 -915.76,-1955.81 ; -1027.27,-1953.16 -913.1,-1953.16 ; -1027.27,-1950.5 -913.1,-1950.5 ; -1027.27,-1947.85 -910.45,-1947.85 ; -1027.27,-1783.24 -559.98,-1783.24 ; -1027.27,-1334.54 -979.48,-1334.54 ; -1024.61,-2059.36 -870.62,-2059.36 ; -1024.61,-1886.78 -939.65,-1886.78 ; -1024.61,-1785.89 -559.98,-1785.89 ; -1024.61,-1743.41 -775.04,-1743.41 ; -1024.61,-1499.15 -934.34,-1499.15 ; -1024.61,-1456.67 -950.27,-1456.67 ; -1021.96,-2210.7 -982.13,-2210.7 ; -1021.96,-2083.25 -995.41,-2083.25 ; -1021.96,-1889.44 -937,-1889.44 ; -1021.96,-1791.2 -801.59,-1791.2 ; -1021.96,-1788.55 -796.28,-1788.55 ; -1021.96,-1517.73 -814.87,-1517.73 ; -1021.96,-1459.32 -950.27,-1459.32 ; -1021.96,-1337.19 -984.79,-1337.19 ; -1019.3,-2178.84 -995.41,-2178.84 ; -1019.3,-2125.73 -995.41,-2125.73 ; -1019.3,-2115.11 -998.06,-2115.11 ; -1019.3,-1793.86 -801.59,-1793.86 ; -1019.3,-1740.76 -775.04,-1740.76 ; -1019.3,-1496.49 -939.65,-1496.49 ; -1019.3,-1493.84 -942.31,-1493.84 ; -1019.3,-1461.98 -950.27,-1461.98 ; -1019.3,-1268.16 -1013.99,-1268.16 ; -1016.65,-2123.08 -995.41,-2123.08 ; -1016.65,-2120.42 -998.06,-2120.42 ; -1016.65,-2117.77 -998.06,-2117.77 ; -1016.65,-1892.09 -931.69,-1892.09 ; -1016.65,-1796.51 -801.59,-1796.51 ; -1016.65,-1491.18 -944.96,-1491.18 ; -1016.65,-1464.63 -952.93,-1464.63 ; -1016.65,-1339.85 -992.75,-1339.85 ; -1013.99,-2213.35 -974.17,-2213.35 ; -1013.99,-2176.18 -992.75,-2176.18 ; -1013.99,-2085.91 -990.1,-2085.91 ; -1013.99,-2062.01 -873.28,-2062.01 ; -1013.99,-1894.75 -926.38,-1894.75 ; -1013.99,-1799.17 -798.94,-1799.17 ; -1013.99,-1488.53 -947.62,-1488.53 ; -1013.99,-1485.87 -947.62,-1485.87 ; -1013.99,-1483.22 -950.27,-1483.22 ; -1013.99,-1472.6 -952.93,-1472.6 ; -1013.99,-1469.94 -952.93,-1469.94 ; -1013.99,-1467.29 -952.93,-1467.29 ; -1011.34,-2173.53 -990.1,-2173.53 ; -1011.34,-1801.82 -793.63,-1801.82 ; -1011.34,-1520.39 -817.52,-1520.39 ; -1011.34,-1480.56 -950.27,-1480.56 ; -1011.34,-1477.91 -950.27,-1477.91 ; -1011.34,-1475.25 -952.93,-1475.25 ; -1008.68,-2088.56 -990.1,-2088.56 ; -1008.68,-1897.4 -918.41,-1897.4 ; -1008.68,-1738.1 -777.7,-1738.1 ; -1006.03,-2216.01 -968.86,-2216.01 ; -1006.03,-2170.87 -987.44,-2170.87 ; -1006.03,-2091.22 -987.44,-2091.22 ; -1006.03,-2064.67 -875.93,-2064.67 ; -1006.03,-1900.06 -913.1,-1900.06 ; -1006.03,-1804.48 -777.7,-1804.48 ; -1006.03,-1260.2 -974.17,-1260.2 ; -1003.37,-2168.22 -987.44,-2168.22 ; -1003.37,-2093.87 -958.24,-2093.87 ; -1003.37,-1807.13 -767.08,-1807.13 ; -1003.37,-1523.04 -817.52,-1523.04 ; -1000.72,-2218.66 -960.89,-2218.66 ; -1000.72,-2165.56 -984.79,-2165.56 ; -1000.72,-2096.53 -955.58,-2096.53 ; -1000.72,-2067.32 -875.93,-2067.32 ; -1000.72,-1902.71 -907.79,-1902.71 ; -1000.72,-1809.79 -756.46,-1809.79 ; -998.06,-2162.91 -982.13,-2162.91 ; -998.06,-2099.18 -952.93,-2099.18 ; -998.06,-1812.44 -748.49,-1812.44 ; -998.06,-1238.96 -907.79,-1238.96 ; -995.41,-2160.25 -982.13,-2160.25 ; -995.41,-2157.6 -979.48,-2157.6 ; -995.41,-2101.84 -950.27,-2101.84 ; -995.41,-2069.98 -878.59,-2069.98 ; -995.41,-1905.37 -899.83,-1905.37 ; -995.41,-1815.1 -740.53,-1815.1 ; -995.41,-1735.45 -777.7,-1735.45 ; -995.41,-1326.57 -971.51,-1326.57 ; -995.41,-1262.85 -974.17,-1262.85 ; -992.75,-2221.32 -952.93,-2221.32 ; -992.75,-2154.94 -979.48,-2154.94 ; -992.75,-2152.28 -976.82,-2152.28 ; -992.75,-2107.15 -971.51,-2107.15 ; -992.75,-2104.49 -968.86,-2104.49 ; -992.75,-2072.63 -878.59,-2072.63 ; -992.75,-1817.75 -732.56,-1817.75 ; -992.75,-1525.7 -820.18,-1525.7 ; -990.1,-2149.63 -976.82,-2149.63 ; -990.1,-2146.97 -976.82,-2146.97 ; -990.1,-2144.32 -974.17,-2144.32 ; -990.1,-2115.11 -974.17,-2115.11 ; -990.1,-2112.46 -976.82,-2112.46 ; -990.1,-2109.8 -974.17,-2109.8 ; -990.1,-2075.29 -878.59,-2075.29 ; -990.1,-1820.41 -724.6,-1820.41 ; -990.1,-1432.77 -942.31,-1432.77 ; -990.1,-1323.92 -968.86,-1323.92 ; -990.1,-1265.51 -971.51,-1265.51 ; -990.1,-1241.61 -910.45,-1241.61 ; -987.44,-2141.66 -974.17,-2141.66 ; -987.44,-2139.01 -974.17,-2139.01 ; -987.44,-2136.35 -974.17,-2136.35 ; -987.44,-2133.7 -974.17,-2133.7 ; -987.44,-2131.04 -974.17,-2131.04 ; -987.44,-2128.39 -974.17,-2128.39 ; -987.44,-2125.73 -974.17,-2125.73 ; -987.44,-2123.08 -974.17,-2123.08 ; -987.44,-2120.42 -974.17,-2120.42 ; -987.44,-2117.77 -974.17,-2117.77 ; -987.44,-2077.94 -881.24,-2077.94 ; -987.44,-1908.02 -894.52,-1908.02 ; -987.44,-1268.16 -968.86,-1268.16 ; -984.79,-2223.97 -942.31,-2223.97 ; -984.79,-2080.6 -881.24,-2080.6 ; -984.79,-1823.06 -719.29,-1823.06 ; -984.79,-1528.35 -820.18,-1528.35 ; -984.79,-1321.26 -966.2,-1321.26 ; -982.13,-1825.72 -713.98,-1825.72 ; -982.13,-1318.61 -966.2,-1318.61 ; -982.13,-1273.47 -966.2,-1273.47 ; -982.13,-1270.82 -966.2,-1270.82 ; -982.13,-1244.27 -910.45,-1244.27 ; -979.48,-2226.63 -934.34,-2226.63 ; -979.48,-1910.68 -886.55,-1910.68 ; -979.48,-1828.37 -708.67,-1828.37 ; -979.48,-1430.12 -939.65,-1430.12 ; -979.48,-1315.95 -963.55,-1315.95 ; -979.48,-1276.13 -963.55,-1276.13 ; -979.48,-1246.92 -913.1,-1246.92 ; -976.82,-1732.79 -777.7,-1732.79 ; -976.82,-1531.01 -820.18,-1531.01 ; -976.82,-1313.3 -963.55,-1313.3 ; -976.82,-1310.64 -960.89,-1310.64 ; -976.82,-1278.78 -963.55,-1278.78 ; -974.17,-2229.28 -921.07,-2229.28 ; -974.17,-2091.22 -966.2,-2091.22 ; -974.17,-1831.03 -703.36,-1831.03 ; -974.17,-1427.46 -939.65,-1427.46 ; -974.17,-1307.99 -960.89,-1307.99 ; -974.17,-1305.33 -960.89,-1305.33 ; -974.17,-1302.68 -958.24,-1302.68 ; -974.17,-1286.75 -937,-1286.75 ; -974.17,-1284.09 -960.89,-1284.09 ; -974.17,-1281.44 -960.89,-1281.44 ; -974.17,-1249.58 -913.1,-1249.58 ; -971.51,-2231.94 -867.97,-2231.94 ; -971.51,-1913.33 -878.59,-1913.33 ; -971.51,-1833.68 -698.05,-1833.68 ; -971.51,-1300.02 -955.58,-1300.02 ; -971.51,-1297.37 -950.27,-1297.37 ; -971.51,-1294.71 -944.96,-1294.71 ; -971.51,-1292.06 -939.65,-1292.06 ; -971.51,-1289.4 -937,-1289.4 ; -971.51,-1252.23 -915.76,-1252.23 ; -968.86,-2234.59 -958.24,-2234.59 ; -968.86,-1533.66 -822.83,-1533.66 ; -968.86,-1424.81 -939.65,-1424.81 ; -968.86,-1254.89 -947.62,-1254.89 ; -966.2,-2237.25 -958.24,-2237.25 ; -966.2,-2120.42 -955.58,-2120.42 ; -966.2,-2117.77 -958.24,-2117.77 ; -966.2,-2115.11 -958.24,-2115.11 ; -966.2,-1915.99 -870.62,-1915.99 ; -966.2,-1836.34 -692.74,-1836.34 ; -966.2,-1257.54 -950.27,-1257.54 ; -963.55,-2277.07 -809.56,-2277.07 ; -963.55,-2239.9 -955.58,-2239.9 ; -963.55,-2125.73 -955.58,-2125.73 ; -963.55,-2123.08 -955.58,-2123.08 ; -963.55,-2112.46 -960.89,-2112.46 ; -963.55,-1921.3 -865.31,-1921.3 ; -963.55,-1918.64 -862.66,-1918.64 ; -963.55,-1838.99 -690.08,-1838.99 ; -963.55,-1536.32 -822.83,-1536.32 ; -963.55,-1422.15 -939.65,-1422.15 ; -963.55,-1260.2 -950.27,-1260.2 ; -960.89,-2242.56 -955.58,-2242.56 ; -960.89,-2083.25 -883.9,-2083.25 ; -960.89,-1419.5 -939.65,-1419.5 ; -960.89,-1262.85 -950.27,-1262.85 ; -958.24,-2247.87 -955.58,-2247.87 ; -958.24,-2245.21 -955.58,-2245.21 ; -958.24,-2104.49 -950.27,-2104.49 ; -958.24,-1841.65 -687.43,-1841.65 ; -958.24,-1416.84 -942.31,-1416.84 ; -958.24,-1268.16 -947.62,-1268.16 ; -958.24,-1265.51 -947.62,-1265.51 ; -955.58,-2253.18 -952.93,-2253.18 ; -955.58,-2250.52 -952.93,-2250.52 ; -955.58,-2234.59 -873.28,-2234.59 ; -955.58,-2085.91 -883.9,-2085.91 ; -955.58,-1730.14 -777.7,-1730.14 ; -955.58,-1538.97 -822.83,-1538.97 ; -955.58,-1414.19 -942.31,-1414.19 ; -955.58,-1273.47 -944.96,-1273.47 ; -955.58,-1270.82 -944.96,-1270.82 ; -952.93,-2274.42 -804.25,-2274.42 ; -952.93,-2109.8 -950.27,-2109.8 ; -952.93,-2107.15 -950.27,-2107.15 ; -952.93,-1844.3 -682.12,-1844.3 ; -952.93,-1411.53 -944.96,-1411.53 ; -950.27,-2271.76 -788.32,-2271.76 ; -950.27,-2088.56 -883.9,-2088.56 ; -950.27,-1846.96 -679.46,-1846.96 ; -950.27,-1408.88 -947.62,-1408.88 ; -947.62,-2269.11 -785.66,-2269.11 ; -947.62,-2266.45 -785.66,-2266.45 ; -947.62,-2091.22 -886.55,-2091.22 ; -947.62,-1541.63 -822.83,-1541.63 ; -944.96,-2263.8 -785.66,-2263.8 ; -944.96,-2261.14 -785.66,-2261.14 ; -944.96,-2258.49 -785.66,-2258.49 ; -944.96,-2255.83 -785.66,-2255.83 ; -944.96,-2253.18 -785.66,-2253.18 ; -944.96,-2250.52 -929.03,-2250.52 ; -944.96,-2247.87 -939.65,-2247.87 ; -944.96,-2237.25 -878.59,-2237.25 ; -944.96,-2096.53 -886.55,-2096.53 ; -944.96,-2093.87 -886.55,-2093.87 ; -944.96,-1849.61 -676.81,-1849.61 ; -942.31,-2101.84 -889.21,-2101.84 ; -942.31,-2099.18 -889.21,-2099.18 ; -942.31,-1544.28 -822.83,-1544.28 ; -942.31,-1284.09 -934.34,-1284.09 ; -942.31,-1254.89 -915.76,-1254.89 ; -939.65,-2125.73 -891.86,-2125.73 ; -939.65,-2123.08 -891.86,-2123.08 ; -939.65,-2120.42 -891.86,-2120.42 ; -939.65,-2117.77 -891.86,-2117.77 ; -939.65,-2115.11 -891.86,-2115.11 ; -939.65,-2112.46 -891.86,-2112.46 ; -939.65,-2109.8 -891.86,-2109.8 ; -939.65,-2107.15 -889.21,-2107.15 ; -939.65,-2104.49 -889.21,-2104.49 ; -939.65,-1852.27 -676.81,-1852.27 ; -939.65,-1281.44 -934.34,-1281.44 ; -937,-1475.25 -926.38,-1475.25 ; -937,-1472.6 -926.38,-1472.6 ; -937,-1469.94 -926.38,-1469.94 ; -937,-1278.78 -934.34,-1278.78 ; -937,-1276.13 -934.34,-1276.13 ; -937,-1257.54 -918.41,-1257.54 ; -934.34,-2239.9 -883.9,-2239.9 ; -934.34,-2178.84 -931.69,-2178.84 ; -934.34,-2176.18 -929.03,-2176.18 ; -934.34,-1854.92 -674.15,-1854.92 ; -934.34,-1546.94 -822.83,-1546.94 ; -934.34,-1480.56 -926.38,-1480.56 ; -934.34,-1477.91 -926.38,-1477.91 ; -934.34,-1467.29 -926.38,-1467.29 ; -934.34,-1464.63 -923.72,-1464.63 ; -934.34,-1461.98 -921.07,-1461.98 ; -934.34,-1387.64 -772.39,-1387.64 ; -934.34,-1260.2 -918.41,-1260.2 ; -931.69,-2173.53 -926.38,-2173.53 ; -931.69,-2170.87 -921.07,-2170.87 ; -931.69,-1727.48 -780.35,-1727.48 ; -931.69,-1483.22 -926.38,-1483.22 ; -931.69,-1459.32 -862.66,-1459.32 ; -931.69,-1456.67 -862.66,-1456.67 ; -931.69,-1390.29 -769.73,-1390.29 ; -931.69,-1262.85 -918.41,-1262.85 ; -929.03,-2168.22 -918.41,-2168.22 ; -929.03,-2165.56 -913.1,-2165.56 ; -929.03,-1857.58 -671.5,-1857.58 ; -929.03,-1549.59 -822.83,-1549.59 ; -929.03,-1485.87 -923.72,-1485.87 ; -929.03,-1454.01 -862.66,-1454.01 ; -929.03,-1451.36 -860,-1451.36 ; -929.03,-1392.95 -769.73,-1392.95 ; -929.03,-1268.16 -921.07,-1268.16 ; -929.03,-1265.51 -921.07,-1265.51 ; -926.38,-2162.91 -907.79,-2162.91 ; -926.38,-1448.7 -860,-1448.7 ; -926.38,-1446.05 -857.35,-1446.05 ; -926.38,-1395.6 -777.7,-1395.6 ; -926.38,-1273.47 -921.07,-1273.47 ; -926.38,-1270.82 -921.07,-1270.82 ; -923.72,-2160.25 -862.66,-2160.25 ; -923.72,-1860.23 -671.5,-1860.23 ; -923.72,-1552.25 -822.83,-1552.25 ; -923.72,-1443.39 -854.69,-1443.39 ; -923.72,-1440.74 -852.04,-1440.74 ; -923.72,-1400.91 -788.32,-1400.91 ; -923.72,-1398.26 -785.66,-1398.26 ; -923.72,-1284.09 -921.07,-1284.09 ; -923.72,-1281.44 -921.07,-1281.44 ; -923.72,-1278.78 -921.07,-1278.78 ; -923.72,-1276.13 -921.07,-1276.13 ; -921.07,-2242.56 -894.52,-2242.56 ; -921.07,-2157.6 -867.97,-2157.6 ; -921.07,-1438.08 -814.87,-1438.08 ; -921.07,-1435.43 -814.87,-1435.43 ; -921.07,-1432.77 -814.87,-1432.77 ; -921.07,-1408.88 -798.94,-1408.88 ; -921.07,-1406.22 -796.28,-1406.22 ; -921.07,-1403.57 -793.63,-1403.57 ; -918.41,-2154.94 -870.62,-2154.94 ; -918.41,-1862.89 -668.84,-1862.89 ; -918.41,-1554.9 -822.83,-1554.9 ; -918.41,-1430.12 -812.21,-1430.12 ; -918.41,-1427.46 -812.21,-1427.46 ; -918.41,-1424.81 -809.56,-1424.81 ; -918.41,-1422.15 -809.56,-1422.15 ; -918.41,-1419.5 -806.9,-1419.5 ; -918.41,-1416.84 -806.9,-1416.84 ; -918.41,-1414.19 -804.25,-1414.19 ; -918.41,-1411.53 -801.59,-1411.53 ; -913.1,-2152.28 -875.93,-2152.28 ; -913.1,-1865.54 -668.84,-1865.54 ; -913.1,-1557.56 -820.18,-1557.56 ; -913.1,-1499.15 -841.42,-1499.15 ; -913.1,-1289.4 -897.17,-1289.4 ; -913.1,-1286.75 -899.83,-1286.75 ; -913.1,-1284.09 -899.83,-1284.09 ; -913.1,-1281.44 -899.83,-1281.44 ; -913.1,-1278.78 -899.83,-1278.78 ; -913.1,-1276.13 -899.83,-1276.13 ; -913.1,-1273.47 -899.83,-1273.47 ; -910.45,-1724.83 -780.35,-1724.83 ; -910.45,-1300.02 -894.52,-1300.02 ; -910.45,-1297.37 -897.17,-1297.37 ; -910.45,-1294.71 -897.17,-1294.71 ; -910.45,-1292.06 -897.17,-1292.06 ; -910.45,-1270.82 -897.17,-1270.82 ; -910.45,-1268.16 -897.17,-1268.16 ; -910.45,-1265.51 -897.17,-1265.51 ; -910.45,-1262.85 -897.17,-1262.85 ; -907.79,-2149.63 -881.24,-2149.63 ; -907.79,-1868.2 -668.84,-1868.2 ; -907.79,-1496.49 -846.73,-1496.49 ; -907.79,-1307.99 -891.86,-1307.99 ; -907.79,-1305.33 -891.86,-1305.33 ; -907.79,-1302.68 -894.52,-1302.68 ; -907.79,-1260.2 -894.52,-1260.2 ; -907.79,-1257.54 -894.52,-1257.54 ; -907.79,-1254.89 -891.86,-1254.89 ; -905.14,-1560.21 -820.18,-1560.21 ; -905.14,-1493.84 -849.38,-1493.84 ; -905.14,-1310.64 -889.21,-1310.64 ; -905.14,-1252.23 -889.21,-1252.23 ; -905.14,-1249.58 -889.21,-1249.58 ; -902.48,-1562.87 -820.18,-1562.87 ; -902.48,-1491.18 -852.04,-1491.18 ; -902.48,-1461.98 -862.66,-1461.98 ; -902.48,-1315.95 -886.55,-1315.95 ; -902.48,-1313.3 -889.21,-1313.3 ; -902.48,-1246.92 -886.55,-1246.92 ; -899.83,-1955.81 -825.49,-1955.81 ; -899.83,-1870.85 -668.84,-1870.85 ; -899.83,-1488.53 -854.69,-1488.53 ; -899.83,-1464.63 -862.66,-1464.63 ; -899.83,-1321.26 -881.24,-1321.26 ; -899.83,-1318.61 -883.9,-1318.61 ; -899.83,-1244.27 -883.9,-1244.27 ; -899.83,-1241.61 -881.24,-1241.61 ; -899.83,-1215.06 -891.86,-1215.06 ; -899.83,-1212.41 -894.52,-1212.41 ; -897.17,-1953.16 -825.49,-1953.16 ; -897.17,-1950.5 -828.14,-1950.5 ; -897.17,-1565.52 -817.52,-1565.52 ; -897.17,-1485.87 -857.35,-1485.87 ; -897.17,-1483.22 -857.35,-1483.22 ; -897.17,-1469.94 -862.66,-1469.94 ; -897.17,-1467.29 -862.66,-1467.29 ; -897.17,-1323.92 -878.59,-1323.92 ; -897.17,-1238.96 -878.59,-1238.96 ; -897.17,-1230.99 -862.66,-1230.99 ; -897.17,-1228.34 -852.04,-1228.34 ; -897.17,-1225.68 -822.83,-1225.68 ; -897.17,-1223.03 -883.9,-1223.03 ; -897.17,-1220.37 -886.55,-1220.37 ; -897.17,-1217.72 -889.21,-1217.72 ; -897.17,-1201.79 -307.76,-1201.79 ; -894.52,-2229.28 -865.31,-2229.28 ; -894.52,-1873.51 -668.84,-1873.51 ; -894.52,-1480.56 -860,-1480.56 ; -894.52,-1477.91 -860,-1477.91 ; -894.52,-1475.25 -860,-1475.25 ; -894.52,-1472.6 -862.66,-1472.6 ; -894.52,-1326.57 -875.93,-1326.57 ; -894.52,-1236.3 -873.28,-1236.3 ; -891.86,-2014.22 -833.45,-2014.22 ; -891.86,-1947.85 -833.45,-1947.85 ; -891.86,-1568.18 -814.87,-1568.18 ; -891.86,-1329.23 -870.62,-1329.23 ; -891.86,-1233.65 -867.97,-1233.65 ; -889.21,-2250.52 -788.32,-2250.52 ; -889.21,-1945.19 -836.11,-1945.19 ; -889.21,-1722.17 -780.35,-1722.17 ; -889.21,-1331.88 -865.31,-1331.88 ; -889.21,-1284.09 -769.73,-1284.09 ; -889.21,-1281.44 -767.08,-1281.44 ; -889.21,-1278.78 -767.08,-1278.78 ; -889.21,-1276.13 -767.08,-1276.13 ; -889.21,-1273.47 -767.08,-1273.47 ; -889.21,-1270.82 -764.42,-1270.82 ; -889.21,-1268.16 -761.77,-1268.16 ; -889.21,-1204.44 -307.76,-1204.44 ; -886.55,-2226.63 -862.66,-2226.63 ; -886.55,-1958.47 -822.83,-1958.47 ; -886.55,-1876.16 -668.84,-1876.16 ; -886.55,-1570.83 -814.87,-1570.83 ; -886.55,-1334.54 -860,-1334.54 ; -886.55,-1265.51 -761.77,-1265.51 ; -886.55,-1262.85 -759.11,-1262.85 ; -886.55,-1207.1 -307.76,-1207.1 ; -883.9,-2162.91 -860,-2162.91 ; -883.9,-1942.54 -841.42,-1942.54 ; -883.9,-1260.2 -753.8,-1260.2 ; -883.9,-1257.54 -745.84,-1257.54 ; -883.9,-1209.75 -862.66,-1209.75 ; -881.24,-2247.87 -788.32,-2247.87 ; -881.24,-2223.97 -860,-2223.97 ; -881.24,-2011.57 -830.8,-2011.57 ; -881.24,-1961.12 -820.18,-1961.12 ; -881.24,-1573.49 -812.21,-1573.49 ; -881.24,-1337.19 -836.11,-1337.19 ; -881.24,-1254.89 -647.6,-1254.89 ; -881.24,-1212.41 -873.28,-1212.41 ; -878.59,-2165.56 -860,-2165.56 ; -878.59,-2008.91 -825.49,-2008.91 ; -878.59,-1939.88 -846.73,-1939.88 ; -878.59,-1878.82 -668.84,-1878.82 ; -878.59,-1576.14 -809.56,-1576.14 ; -878.59,-1339.85 -788.32,-1339.85 ; -878.59,-1252.23 -642.29,-1252.23 ; -875.93,-2221.32 -857.35,-2221.32 ; -875.93,-2168.22 -857.35,-2168.22 ; -875.93,-1963.78 -820.18,-1963.78 ; -875.93,-1249.58 -639.64,-1249.58 ; -875.93,-1223.03 -828.14,-1223.03 ; -873.28,-2245.21 -790.97,-2245.21 ; -873.28,-2218.66 -857.35,-2218.66 ; -873.28,-2170.87 -854.69,-2170.87 ; -873.28,-2006.26 -822.83,-2006.26 ; -873.28,-2003.6 -820.18,-2003.6 ; -873.28,-1966.43 -817.52,-1966.43 ; -873.28,-1719.52 -780.35,-1719.52 ; -873.28,-1578.8 -806.9,-1578.8 ; -873.28,-1342.5 -790.97,-1342.5 ; -873.28,-1246.92 -636.98,-1246.92 ; -870.62,-2216.01 -854.69,-2216.01 ; -870.62,-2173.53 -854.69,-2173.53 ; -870.62,-2000.95 -820.18,-2000.95 ; -870.62,-1971.74 -817.52,-1971.74 ; -870.62,-1969.09 -817.52,-1969.09 ; -870.62,-1881.47 -671.5,-1881.47 ; -870.62,-1244.27 -812.21,-1244.27 ; -867.97,-2242.56 -790.97,-2242.56 ; -867.97,-2213.35 -854.69,-2213.35 ; -867.97,-2210.7 -852.04,-2210.7 ; -867.97,-2176.18 -852.04,-2176.18 ; -867.97,-1998.29 -817.52,-1998.29 ; -867.97,-1995.64 -817.52,-1995.64 ; -867.97,-1992.98 -817.52,-1992.98 ; -867.97,-1979.71 -814.87,-1979.71 ; -867.97,-1977.05 -814.87,-1977.05 ; -867.97,-1974.4 -814.87,-1974.4 ; -867.97,-1581.45 -804.25,-1581.45 ; -867.97,-1345.16 -790.97,-1345.16 ; -867.97,-1220.37 -833.45,-1220.37 ; -865.31,-2239.9 -793.63,-2239.9 ; -865.31,-2208.04 -852.04,-2208.04 ; -865.31,-2205.39 -849.38,-2205.39 ; -865.31,-2181.49 -852.04,-2181.49 ; -865.31,-2178.84 -852.04,-2178.84 ; -865.31,-1990.33 -814.87,-1990.33 ; -865.31,-1987.67 -814.87,-1987.67 ; -865.31,-1985.02 -814.87,-1985.02 ; -865.31,-1982.36 -814.87,-1982.36 ; -865.31,-1584.11 -798.94,-1584.11 ; -865.31,-1241.61 -820.18,-1241.61 ; -862.66,-2202.73 -825.49,-2202.73 ; -862.66,-2200.08 -828.14,-2200.08 ; -862.66,-2197.42 -830.8,-2197.42 ; -862.66,-2194.77 -833.45,-2194.77 ; -862.66,-2192.11 -838.76,-2192.11 ; -862.66,-2189.46 -844.07,-2189.46 ; -862.66,-2186.8 -849.38,-2186.8 ; -862.66,-2184.15 -849.38,-2184.15 ; -862.66,-1937.23 -860,-1937.23 ; -862.66,-1884.13 -671.5,-1884.13 ; -862.66,-1347.81 -790.97,-1347.81 ; -860,-2237.25 -793.63,-2237.25 ; -860,-1716.86 -780.35,-1716.86 ; -860,-1586.76 -796.28,-1586.76 ; -857.35,-2234.59 -838.76,-2234.59 ; -857.35,-2125.73 -682.12,-2125.73 ; -857.35,-2123.08 -679.46,-2123.08 ; -857.35,-2120.42 -682.12,-2120.42 ; -857.35,-2117.77 -684.77,-2117.77 ; -857.35,-2115.11 -687.43,-2115.11 ; -857.35,-2112.46 -692.74,-2112.46 ; -857.35,-2109.8 -695.39,-2109.8 ; -857.35,-1589.42 -788.32,-1589.42 ; -857.35,-1238.96 -828.14,-1238.96 ; -854.69,-2231.94 -841.42,-2231.94 ; -854.69,-2107.15 -698.05,-2107.15 ; -854.69,-2104.49 -629.02,-2104.49 ; -854.69,-2101.84 -629.02,-2101.84 ; -854.69,-2099.18 -629.02,-2099.18 ; -854.69,-1886.78 -674.15,-1886.78 ; -854.69,-1592.07 -721.94,-1592.07 ; -852.04,-2096.53 -629.02,-2096.53 ; -852.04,-2093.87 -629.02,-2093.87 ; -852.04,-2091.22 -626.36,-2091.22 ; -852.04,-1714.21 -780.35,-1714.21 ; -852.04,-1350.47 -820.18,-1350.47 ; -852.04,-1334.54 -836.11,-1334.54 ; -849.38,-2088.56 -626.36,-2088.56 ; -849.38,-2085.91 -623.71,-2085.91 ; -849.38,-2083.25 -623.71,-2083.25 ; -849.38,-1594.73 -721.94,-1594.73 ; -849.38,-1475.25 -814.87,-1475.25 ; -849.38,-1331.88 -836.11,-1331.88 ; -849.38,-1329.23 -836.11,-1329.23 ; -846.73,-2080.6 -621.05,-2080.6 ; -846.73,-2077.94 -621.05,-2077.94 ; -846.73,-1889.44 -676.81,-1889.44 ; -846.73,-1597.38 -721.94,-1597.38 ; -846.73,-1477.91 -817.52,-1477.91 ; -846.73,-1326.57 -836.11,-1326.57 ; -846.73,-1323.92 -836.11,-1323.92 ; -844.07,-2075.29 -764.42,-2075.29 ; -844.07,-2072.63 -772.39,-2072.63 ; -844.07,-1711.55 -780.35,-1711.55 ; -844.07,-1600.04 -724.6,-1600.04 ; -844.07,-1480.56 -817.52,-1480.56 ; -844.07,-1321.26 -836.11,-1321.26 ; -844.07,-1318.61 -836.11,-1318.61 ; -844.07,-1315.95 -838.76,-1315.95 ; -844.07,-1313.3 -838.76,-1313.3 ; -844.07,-1310.64 -841.42,-1310.64 ; -841.42,-2069.98 -780.35,-2069.98 ; -841.42,-2067.32 -783.01,-2067.32 ; -841.42,-1602.69 -724.6,-1602.69 ; -841.42,-1483.22 -820.18,-1483.22 ; -841.42,-1209.75 -307.76,-1209.75 ; -838.76,-2064.67 -785.66,-2064.67 ; -838.76,-1708.9 -780.35,-1708.9 ; -838.76,-1605.35 -724.6,-1605.35 ; -838.76,-1485.87 -822.83,-1485.87 ; -836.11,-2062.01 -788.32,-2062.01 ; -836.11,-2059.36 -790.97,-2059.36 ; -836.11,-1892.09 -679.46,-1892.09 ; -836.11,-1608 -724.6,-1608 ; -833.45,-2205.39 -825.49,-2205.39 ; -833.45,-2056.7 -793.63,-2056.7 ; -833.45,-1706.24 -777.7,-1706.24 ; -833.45,-1610.66 -724.6,-1610.66 ; -833.45,-1472.6 -814.87,-1472.6 ; -833.45,-1440.74 -814.87,-1440.74 ; -833.45,-1228.34 -820.18,-1228.34 ; -830.8,-2234.59 -796.28,-2234.59 ; -830.8,-2054.05 -796.28,-2054.05 ; -830.8,-1613.31 -724.6,-1613.31 ; -830.8,-1469.94 -814.87,-1469.94 ; -830.8,-1443.39 -814.87,-1443.39 ; -830.8,-1212.41 -636.98,-1212.41 ; -828.14,-2231.94 -796.28,-2231.94 ; -828.14,-2208.04 -822.83,-2208.04 ; -828.14,-2051.39 -796.28,-2051.39 ; -828.14,-1703.59 -777.7,-1703.59 ; -828.14,-1615.97 -727.25,-1615.97 ; -828.14,-1467.29 -814.87,-1467.29 ; -828.14,-1446.05 -814.87,-1446.05 ; -825.49,-2210.7 -822.83,-2210.7 ; -825.49,-2048.74 -798.94,-2048.74 ; -825.49,-1929.26 -817.52,-1929.26 ; -825.49,-1894.75 -684.77,-1894.75 ; -825.49,-1700.93 -777.7,-1700.93 ; -825.49,-1618.62 -727.25,-1618.62 ; -825.49,-1501.8 -801.59,-1501.8 ; -825.49,-1464.63 -814.87,-1464.63 ; -825.49,-1461.98 -814.87,-1461.98 ; -825.49,-1459.32 -814.87,-1459.32 ; -825.49,-1456.67 -814.87,-1456.67 ; -825.49,-1454.01 -814.87,-1454.01 ; -825.49,-1451.36 -814.87,-1451.36 ; -825.49,-1448.7 -814.87,-1448.7 ; -825.49,-1215.06 -642.29,-1215.06 ; -822.83,-2046.08 -798.94,-2046.08 ; -822.83,-2043.43 -801.59,-2043.43 ; -822.83,-1698.28 -777.7,-1698.28 ; -822.83,-1623.93 -727.25,-1623.93 ; -822.83,-1621.28 -727.25,-1621.28 ; -822.83,-1230.99 -817.52,-1230.99 ; -820.18,-2040.77 -801.59,-2040.77 ; -820.18,-1931.92 -798.94,-1931.92 ; -820.18,-1695.62 -775.04,-1695.62 ; -820.18,-1626.59 -727.25,-1626.59 ; -820.18,-1337.19 -783.01,-1337.19 ; -820.18,-1217.72 -642.29,-1217.72 ; -817.52,-1934.57 -769.73,-1934.57 ; -817.52,-1692.97 -775.04,-1692.97 ; -817.52,-1631.9 -724.6,-1631.9 ; -817.52,-1629.24 -727.25,-1629.24 ; -814.87,-2038.12 -801.59,-2038.12 ; -814.87,-1937.23 -639.64,-1937.23 ; -814.87,-1690.31 -775.04,-1690.31 ; -814.87,-1637.21 -724.6,-1637.21 ; -814.87,-1634.55 -724.6,-1634.55 ; -814.87,-1499.15 -796.28,-1499.15 ; -814.87,-1220.37 -642.29,-1220.37 ; -812.21,-2035.46 -801.59,-2035.46 ; -812.21,-1939.88 -636.98,-1939.88 ; -812.21,-1897.4 -690.08,-1897.4 ; -812.21,-1687.66 -772.39,-1687.66 ; -812.21,-1685 -769.73,-1685 ; -812.21,-1642.52 -724.6,-1642.52 ; -812.21,-1639.86 -724.6,-1639.86 ; -812.21,-1223.03 -636.98,-1223.03 ; -809.56,-2032.81 -804.25,-2032.81 ; -809.56,-1942.54 -636.98,-1942.54 ; -809.56,-1682.35 -769.73,-1682.35 ; -809.56,-1679.69 -767.08,-1679.69 ; -809.56,-1650.49 -724.6,-1650.49 ; -809.56,-1647.83 -721.94,-1647.83 ; -809.56,-1645.18 -724.6,-1645.18 ; -809.56,-1496.49 -793.63,-1496.49 ; -809.56,-1334.54 -780.35,-1334.54 ; -809.56,-1225.68 -629.02,-1225.68 ; -806.9,-2030.15 -804.25,-2030.15 ; -806.9,-1945.19 -636.98,-1945.19 ; -806.9,-1677.04 -764.42,-1677.04 ; -806.9,-1674.38 -761.77,-1674.38 ; -806.9,-1671.73 -759.11,-1671.73 ; -806.9,-1669.07 -756.46,-1669.07 ; -806.9,-1666.42 -753.8,-1666.42 ; -806.9,-1663.76 -751.15,-1663.76 ; -806.9,-1661.11 -745.84,-1661.11 ; -806.9,-1658.45 -740.53,-1658.45 ; -806.9,-1655.8 -737.87,-1655.8 ; -806.9,-1653.14 -732.56,-1653.14 ; -806.9,-1554.9 -769.73,-1554.9 ; -806.9,-1552.25 -769.73,-1552.25 ; -806.9,-1549.59 -769.73,-1549.59 ; -806.9,-1546.94 -772.39,-1546.94 ; -806.9,-1544.28 -772.39,-1544.28 ; -806.9,-1541.63 -769.73,-1541.63 ; -806.9,-1538.97 -769.73,-1538.97 ; -806.9,-1536.32 -769.73,-1536.32 ; -806.9,-1493.84 -790.97,-1493.84 ; -806.9,-1228.34 -626.36,-1228.34 ; -804.25,-1947.85 -634.33,-1947.85 ; -804.25,-1560.21 -767.08,-1560.21 ; -804.25,-1557.56 -769.73,-1557.56 ; -804.25,-1533.66 -769.73,-1533.66 ; -804.25,-1531.01 -767.08,-1531.01 ; -804.25,-1491.18 -788.32,-1491.18 ; -804.25,-1488.53 -785.66,-1488.53 ; -804.25,-1350.47 -788.32,-1350.47 ; -804.25,-1331.88 -775.04,-1331.88 ; -804.25,-1230.99 -626.36,-1230.99 ; -801.59,-1953.16 -631.67,-1953.16 ; -801.59,-1950.5 -634.33,-1950.5 ; -801.59,-1565.52 -764.42,-1565.52 ; -801.59,-1562.87 -767.08,-1562.87 ; -801.59,-1528.35 -767.08,-1528.35 ; -801.59,-1485.87 -780.35,-1485.87 ; -801.59,-1483.22 -777.7,-1483.22 ; -801.59,-1353.12 -788.32,-1353.12 ; -801.59,-1244.27 -634.33,-1244.27 ; -801.59,-1241.61 -631.67,-1241.61 ; -801.59,-1238.96 -631.67,-1238.96 ; -801.59,-1236.3 -629.02,-1236.3 ; -801.59,-1233.65 -626.36,-1233.65 ; -798.94,-1958.47 -626.36,-1958.47 ; -798.94,-1955.81 -629.02,-1955.81 ; -798.94,-1568.18 -761.77,-1568.18 ; -798.94,-1525.7 -764.42,-1525.7 ; -798.94,-1480.56 -775.04,-1480.56 ; -798.94,-1477.91 -772.39,-1477.91 ; -798.94,-1475.25 -772.39,-1475.25 ; -798.94,-1472.6 -769.73,-1472.6 ; -796.28,-1966.43 -607.78,-1966.43 ; -796.28,-1963.78 -618.4,-1963.78 ; -796.28,-1961.12 -623.71,-1961.12 ; -796.28,-1900.06 -700.7,-1900.06 ; -796.28,-1570.83 -759.11,-1570.83 ; -796.28,-1523.04 -761.77,-1523.04 ; -796.28,-1469.94 -767.08,-1469.94 ; -796.28,-1467.29 -764.42,-1467.29 ; -796.28,-1464.63 -764.42,-1464.63 ; -796.28,-1461.98 -764.42,-1461.98 ; -796.28,-1459.32 -761.77,-1459.32 ; -796.28,-1456.67 -761.77,-1456.67 ; -796.28,-1454.01 -759.11,-1454.01 ; -796.28,-1451.36 -759.11,-1451.36 ; -796.28,-1448.7 -759.11,-1448.7 ; -796.28,-1446.05 -759.11,-1446.05 ; -796.28,-1443.39 -756.46,-1443.39 ; -796.28,-1440.74 -756.46,-1440.74 ; -796.28,-1355.78 -788.32,-1355.78 ; -796.28,-1329.23 -769.73,-1329.23 ; -793.63,-1977.05 -583.88,-1977.05 ; -793.63,-1974.4 -578.57,-1974.4 ; -793.63,-1971.74 -575.91,-1971.74 ; -793.63,-1969.09 -573.26,-1969.09 ; -793.63,-1520.39 -759.11,-1520.39 ; -793.63,-1438.08 -756.46,-1438.08 ; -793.63,-1435.43 -756.46,-1435.43 ; -793.63,-1366.4 -790.97,-1366.4 ; -793.63,-1363.74 -788.32,-1363.74 ; -793.63,-1361.09 -788.32,-1361.09 ; -793.63,-1358.43 -788.32,-1358.43 ; -790.97,-2221.32 -775.04,-2221.32 ; -790.97,-2218.66 -777.7,-2218.66 ; -790.97,-2216.01 -777.7,-2216.01 ; -790.97,-2213.35 -777.7,-2213.35 ; -790.97,-2210.7 -777.7,-2210.7 ; -790.97,-2208.04 -777.7,-2208.04 ; -790.97,-2205.39 -777.7,-2205.39 ; -790.97,-2202.73 -777.7,-2202.73 ; -790.97,-2200.08 -777.7,-2200.08